# Altium PCB УШЯИ.411618.029Э.pcbdoc (part 2 of 6)
Units mil, origin at the board's own origin, x right, y up, seen from the top; angles counter-clockwise.
Board outline 13385.8 x 6692.9 mil, 4 copper layers (Top Layer, Supply, GND, Bottom Layer), stack 62.3 mil thick; 637 components, 474 nets, 1978 pads, 458 vias.
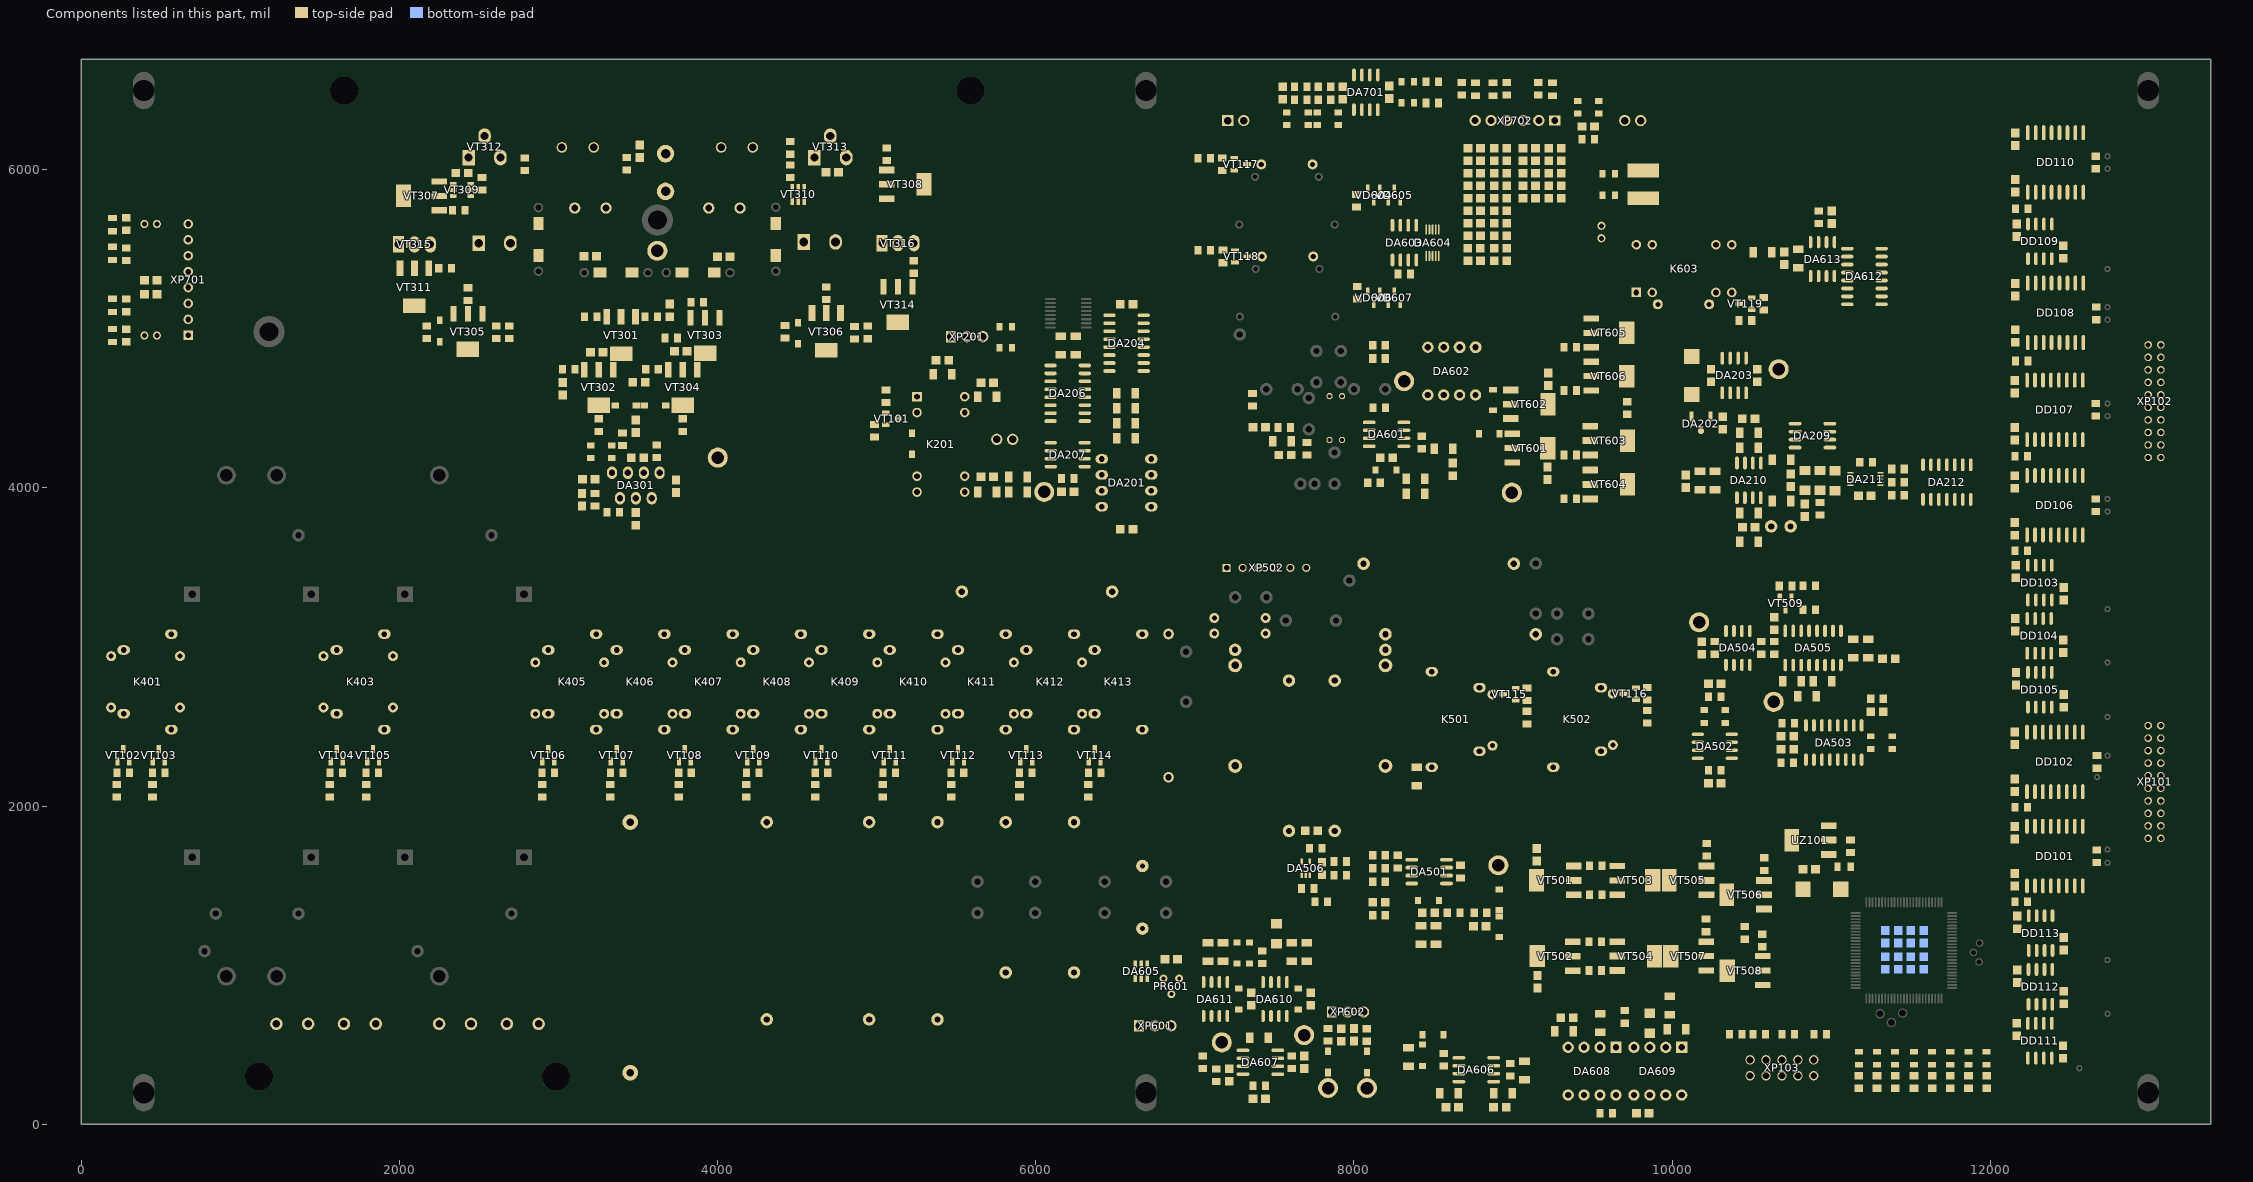
[diagram p4: the components of this part, seen from the top]

## Components (designator, comment, footprint, x,y, rotation, side; value= is the part's Value field where it differs from the comment) (continued)
R201 "Резистор 10кОм 0.25Вт 1% [1206]" R1206#1 6566.9,4310.8 r180 top locked
R202 "Резистор 4,99кОм 0.25Вт 1% [1206]" R1206#1 6566.9,4405.3 r0 top locked
R203 "Резистор 2,49кОм 0.25Вт 1% [1206]" R1206#1 6566.9,4499.8 r180 top locked
R204 "Резистор 2,49кОм 0.25Вт 1% [1206]" R1206#1 6566.9,4594.3 r0 top locked
R205 "Резистор 9,09кОм 0.25Вт 1% [1206]" R1206#1 6157.5,4893.5 r90 top locked
R206 "Резистор 1кОм 0.25Вт 1% [1206]" R1206#1 6251.9,4893.5 r270 top locked
R207 "Резистор 120Ом 0.125Вт 1% [0805]" R0805#1 6200.8,4058.8 r180 top locked
R208 "Резистор 3,83кОм 0.25Вт 1% [1206]" R1206#2 5887.8,3974 r180 top locked
R209 "Резистор 4,99кОм 0.25Вт 1% [1206]" R1206#2 5694.9,3974 r180 top locked
R210 "Резистор 40,2кОм 0.25Вт 1% [1206]" R1206#1 5413.4,4713.8 r0 top locked
R211 "Резистор 3,83кОм 0.25Вт 1% [1206]" R1206#2 5887.8,4068.5 r180 top locked
R213 "Резистор 2кОм 0.25Вт 1% [1206]" R1206#2 5694.9,4572.4 r180 top locked
R217 "Резистор 24,9кОм 0.25Вт 1% [1206]" R1206#1 10482.2,4345.9 r180 top locked
R218 "Резистор 11,8кОм 0.25Вт 1% [1206]" R1206#1 10482.2,4251.4 r180 top locked
R219 "Резистор 24,9кОм 0.25Вт 1% [1206]" R1206#2 10175.1,4046.7 r270 top locked
R220 "Резистор 30,1кОм 0.25Вт 1% [1206]" R1206#2 10269.6,4046.7 r270 top locked
R221 "Резистор 20кОм 0.25Вт 1% [1206]" R1206#1 10482.2,3660.8 r0 top locked
R222 "Резистор 14кОм 0.25Вт 1% [1206]" R1206#1 10482.2,3841.9 r0 top locked
R223 "Резистор 33Ом 0,125Вт 1% [0805]" R1206#1 10686.9,3916.7 r180 top locked
R224 "Резистор 33Ом 0,125Вт 1% [0805]" R1206#1 10686.9,4176.6 r180 top locked
R225 "Резистор 33Ом 0,125Вт 1% [0805]" R0805#1 11419.3,4118.4 r180 top locked
R226 "Резистор 33Ом 0,125Вт 1% [0805]" R0805#1 11419.3,4035.7 r180 top locked
R227 "Резистор 33Ом 0,125Вт 1% [0805]" R0805#1 11419.3,3953 r180 top locked
R228 "Резистор 22Ом 0,125Вт 1% [0805]" R0805#3 10929.1,3867.6 r90 top locked
R229 "Резистор 15Ом 0,125Вт 1% [0805]" R0805#3 11218.5,4161.7 r180 top locked
R301 "Резистор 4.6кОм 0,125Вт 1% [0805]" R0805#2 3345.1,3846.5 r0 top locked
R302 "Резистор 1.2кОм 0,125Вт 1% [0805]" R0805#1 3229.7,3924.5 r270 top locked
R303 "Резистор 1.8кОм 0,125Вт 1% [0805]" R0805#1 3402.9,4306 r270 top locked
R304 "Резистор 1.2кОм 0,125Вт 1% [0805]" R0805#1 3618.3,4230.4 r270 top locked
R305 "Резистор 220Ом 0,125Вт 1% [0805]" R0805#2 3202.2,5075.6 r0 top locked
R306 "Резистор 220Ом 0,125Вт 1% [0805]" R0805#2 3064.4,4744.9 r0 top locked
R307 "Резистор 22кОм 0,125Вт 1% [0805]" R0805#1 3584,5075.6 r0 top locked
R308 "Резистор 22кОм 0,125Вт 1% [0805]" R0805#2 3710,4941.8 r180 top locked
R309 "Резистор 220Ом 0,125Вт 1% [0805]" R0805#2 3871.4,5166.2 r180 top locked
R310 "Резистор 220Ом 0,125Вт 1% [0805]" R0805#3 3588,4744.9 r0 top locked
R311 "Резистор 3кОм 0,125Вт 1% [0805]" R0805#1 2691.1,4977.8 r90 top locked
R312 "Резистор 2.4кОм 0,125Вт 1% [0805]" R0805#1 2608.4,4977.8 r90 top locked
R313 "Резистор 7.2кОм 0,125Вт 1% [0805]" R0805#1 2171.4,4977.8 r90 top locked
R314 "Резистор 18кОм 0,125Вт 1% [0805]" R0805#3 2431.2,5218 r90 top locked
R315 "Резистор 120Ом 0,125Вт 1% [0805]" R0805#2 3253.3,4394.5 r270 top locked
R316 "Резистор 120Ом 0,125Вт 1% [0805]" R0805#2 3780.9,4394.5 r270 top locked
R317 "Резистор 7.2кОм 0,125Вт 1% [0805]" R0805#1 4423.9,4980.4 r90 top locked
R318 "Резистор 2.4кОм 0,125Вт 1% [0805]" R0805#3 4861.1,4975.1 r90 top locked
R319 "Резистор 3кОм 0,125Вт 1% [0805]" R0805#3 4943.6,4976.5 r90 top locked
R320 "Резистор 18кОм 0,125Вт 1% [0805]" R0805#3 4684,5223.1 r90 top locked
R321 "Резистор 240Ом 0.25Вт 1% [1206]" R0805#3 2519.7,5911.7 r90 top locked
R322 "Резистор 1кОм 0,125Вт 5% [0805]" R0805#2 2787.4,6033.7 r270 top locked
R323 "Резистор 300Ом 0,125Вт 1% [0805]" R0805#1 2374,5744.4 r0 top locked
R324 "Резистор MP930-0.04-1% [TO-220-2]" TO-220-2_L10.4-W3.2-P5.08-L#1 3122,6139.3 r180 top locked
R325 "Резистор 100Ом 0,125Вт 1% [0805]" R0805#3 3429.1,6036.9 r270 top locked
R326 "Резистор MP930-0.04-1% [TO-220-2]" TO-220-2_L10.4-W3.2-P5.08-L#1 4122,6139.3 r180 top locked
R327 "Резистор 300Ом 0,125Вт 1% [0805]" R0805#1 5063,6096.7 r90 top locked
R328 "Резистор 1кОм 0,125Вт 5% [0805]" R0805#3 4456.7,6136.1 r90 top locked
R329 "Резистор 240Ом 0.25Вт 1% [1206]" R0805#1 4456.7,5990.4 r90 top locked
R330 "Резистор 1.5кОм 0,125Вт 1% [0805]" R0805#3 2287.4,5380.2 r0 top locked
R331 "Резистор 1.5кОм 0,125Вт 1% [0805]" R0805#2 5232.3,5388.1 r90 top locked
R401 "Резистор C2-29В-0,25  24кОм ±0,5% [DIP]" ?#3 6007.9,3347.6 r180 top locked
R402 "Резистор SM204031006FE 100МОм ±1%[DIP]" RES-TH_L27.4-W2.5-P22.86-D0.8 6834.6,2631.1 r270 top locked
R403 "Резистор RK1/4DCT52R1105F 11 МОм ±1% [DIP]" RK1/4DCT52R1105F 6669.7,1426.4 r270 top locked
R404 "Резистор C2-29В-0,25 1 МОм ±0,5% [DIP]" ?#3 6240.5,1426.4 r270 top locked
R405 "Резистор C2-29В-0,25 100 кОм ±0,5% [DIP]" ?#3 5811.4,1426.4 r270 top locked
R406 "Резистор C2-29B-1 10 кОм ±0,5% [DIP]" ?#4 5382.3,1278.7 r270 top locked
R407 "Резистор C2-29B-1 1 кОм ±0,5% [DIP]" ?#4 4953.1,1278.7 r270 top locked
R408 "Резистор C2-29B-1 100 Ом ±0,5% [DIP]" ?#4 4309.4,1278.7 r270 top locked
R409 "Резистор C2-29B-2 10 Ом ±0,5% [DIP]" ?#5 3451.2,1111.4 r270 top locked
R410 "Резистор MP930-2.00-1% [TO-220-2]" TO-220-2_L10.4-W3.2-P5.08-L#2 2775.6,631.1 r0 top locked
R411 "Резистор MP930-2.00-1% [TO-220-2]" TO-220-2_L10.4-W3.2-P5.08-L#2 2350.4,631.1 r0 top locked
R412 "Резистор MP930-0.20-1% [TO-220-2]" TO-220-2_L10.4-W3.2-P5.08-L#2 1752,631.1 r0 top locked
R413 "Резистор MP930-0.20-1% [TO-220-2]" TO-220-2_L10.4-W3.2-P5.08-L#2 1326.8,631.1 r0 top locked
R501 "Резистор C2-29В-0,25 1,2кОм ±0,5% [DIP]" ?#6 7725.5,2981.4 r0 top locked
R502 "Резистор C2-29В-0,25 301кОм ±0,5% [DIP]" ?#6 8670.4,3079.8 r0 top locked
R503 "Резистор C2-29В-0,25 5.1кОм ±0,5% [DIP]" ?#6 8532.7,3522.8 r0 top locked
R504 "Резистор 91кОм 0,125Вт 1% [0805]" R0805#2 8157.5,1312.5 r0 top locked
R505 "Резистор 2.4кОм 0,25Вт 1% [1206]" R1206#1 8394.8,2186.1 r90 top locked
R506 "Резистор C2-29В-0,25 51Ом ±0,5% [DIP]" ?#3 7591.6,2316 r90 top
R507 "Резистор C2-29В-0,25 22Ом ±0,5% [DIP]" ?#6 7879,2316 r270 top locked
R508 "Резистор 33Ом 0,125Вт 1% [0805]" R0805#3 8669.3,1588.1 r90 top locked
R509 "Резистор 150Ом 0,25Вт 1% [1206]" R1206#3 8515.7,1190.4 r270 top locked
R510 "Резистор 150Ом 0,25Вт 1% [1206]" R1206#2 8421.2,1190.4 r90 top locked
R511 "Резистор 5,1кОм 0,125Вт 1% [0805]" R0805#1 8626,1328.2 r180 top locked
R512 "Резистор 4,7кОм 0,125Вт 1% [0805]" R0805#2 8795.3,1328.2 r0 top locked
R513 "Резистор 820Ом 0,125Вт 1% [0805]" R0805#3 10216.5,1725.9 r90 top locked
R514 "Резистор 2кОм 0,125Вт 1% [0805]" R0805#1 10578.7,1635.3 r90 top locked
R515 "Резистор 200кОм 0,125Вт 1% [0805]" R0805#2 10456.7,1202.3 r90 top locked
R516 "Резистор 820Ом 0,125Вт 1% [0805]" R0805#3 10212.6,1249.5 r270 top locked
R517 "Резистор 2кОм 0,125Вт 1% [0805]" R0805#3 10566.9,1155 r270 top locked
R518 "Резистор 40,2кОм 0.25Вт 1% [1206]" R0805#3 10267.7,2686.5 r0 top locked
R519 "Резистор 15кОм 0,125Вт 1% [0805]" R0805#3 10267.7,2225.9 r180 top locked
R520 "Резистор 200кОм 0,125Вт 1% [0805]" R0805#3 11287.4,2674.7 r0 top locked
R521 "Резистор 10кОм 0,125Вт 1% [0805]" R0805#3 10724.4,2273.1 r180 top locked
R522 "Резистор 100кОм 0,125Вт 1% [0805]" R0805#2 10728.3,2521.2 r180 top locked
R523 "Резистор 4,02кОм 0.25Вт 1% [1206]" R1206#3 10751.9,2784.9 r180 top locked
R524 "Резистор 4,02кОм 0.25Вт 1% [1206]" R1206#3 10846.4,2690.4 r180 top locked
R525 "Резистор 4,02кОм 0.25Вт 1% [1206]" R1206#2 10944.9,2784.9 r180 top locked
R526 "Резистор 4,02кОм 0.25Вт 1% [1206]" R1206#2 11137.8,2989.7 r270 top locked
R527 "Резистор 4,02кОм 0.25Вт 1% [1206]" R1206#3 11232.3,2989.7 r90 top locked
R528 "Резистор 3,6кОм 0,125Вт 1% [0805]" R0805#3 10267.7,2993.6 r270 top locked
R529 "Резистор 110кОм 0,125Вт 1% [0805]" R0805#3 10559,2993.6 r270 top locked
R530 "Резистор 110кОм 0,125Вт 1% [0805]" R0805#3 10641.7,2993.6 r90 top locked
R531 "Резистор 5,3кОм 0,125Вт 1% [0805]" R0805#3 10862.2,3233.8 r180 top locked
R532 "Резистор 100Ом 0,125Вт 1% [0805]" R0805#3 10862.2,3383.4 r180 top locked
R533 "Резистор 100Ом 0,125Вт 1% [0805]" R0805#2 10712.6,3383.3 r0 top locked
R534 "Резистор 400Ом 0,125Вт 1% [0805]" R0805#1 9519.7,1623.5 r180 top locked
R535 "Резистор 150Ом 0,125Вт 1% [0805]" R0805#1 9519.7,1442.4 r180 top locked
R536 "Резистор 150Ом 0,125Вт 1% [0805]" R0805#2 9515.7,966.1 r180 top locked
R537 "Резистор 400Ом 0,125Вт 1% [0805]" R0805#2 9515.7,1147.2 r180 top locked
R538 "Резистор 150Ом 0,125Вт 1% [0805]" R0805#1 7913.4,1651.1 r180 top locked
R539 "Резистор 150Ом 0,125Вт 1% [0805]" R0805#1 7913.4,1564.5 r180 top locked
R601 "Резистор 51кОм 0,125Вт 1% [0805]" R0805#2 7362.2,4552.6 r270 top locked
R602 "Резистор 12кОм 0,125Вт 1% [0805]" R0805#1 7704.7,4245.6 r270 top locked
R603 "Резистор 5,1кОм 0,125Вт 1% [0805]" R0805#2 7563,4379.4 r0 top locked
R604 "Резистор 301кОм 0.25Вт 1% [1206]" R1206#1 7547.2,4292.8 r0 top locked
R605 "Резистор C2-29В-0,125 5,1кОм 0,125Вт 1% [DIP]" R0.125W 7846.4,4438.5 r90 top locked
R606 "Резистор C2-29В-0,125 301кОм 0,125Вт 1% [DIP]" R0.125W 7925.2,4438.5 r90 top locked
R607 "Резистор 51кОм 0,125Вт 1% [0805]" R0805#2 8157.5,4895.2 r0 top locked
R608 "Резистор 12кОм 0,125Вт 1% [0805]" R0805#2 8157.5,4812.5 r0 top locked
R609 "Резистор 33Ом 0,125Вт 1% [0805]" R0805#2 8425.2,4284.9 r270 top locked
R610 "Резистор 33Ом 0,125Вт 1% [0805]" R0805#1 8159.8,4504.3 r0 top
R611 "Резистор 150Ом 0,25Вт 1% [1206]" R1206#1 8385.8,3962.1 r0 top locked
R612 "Резистор 150Ом 0,25Вт 1% [1206]" R1206#1 8385.8,4056.6 r180 top locked
R613 "Резистор 5,1кОм 0,125Вт 1% [0805]" R0805#2 8126,4033 r0 top locked
R614 "Резистор 4,7кОм 0,25Вт 1% [1206]" R1206#1 8563,4245.6 r180 top locked
R615 "Резистор 820Ом 0,125Вт 1% [0805]" R0805#2 9358.2,4206.2 r180 top locked
R616 "Резистор 2кОм 0,125Вт 1% [0805]" R0805#2 9358.2,3930.6 r180 top locked
R617 "Резистор 200кОм 0,125Вт 1% [0805]" R0805#1 9716.5,4501.5 r270 top locked
R618 "Резистор 820Ом 0,125Вт 1% [0805]" R0805#1 9358.2,4883.4 r0 top locked
R619 "Резистор 2кОм 0,125Вт 1% [0805]" R0805#1 9358.2,4611.7 r0 top locked
R620 "Резистор 300Ом 0,125Вт 1% [0805]" R0805#3 8016,5803.6 r270 top locked
R621 "Резистор 300Ом 0,125Вт 1% [0805]" R0805#1 8019.7,5225.9 r270 top locked
R622 "Резистор 300Ом 0,125Вт 1% [0805]" R0805#3 8316.9,5344 r0 top locked
R623 "Резистор 10кОм 0.25Вт 1% [1206]" R1206#3 8342.5,422.4 r270 top locked
R624 "Резистор 10кОм 0.25Вт 1% [1206]" R1206#1 8598.4,194.1 r0 top locked
R625 "Резистор 10кОм 0.25Вт 1% [1206]" R1206#1 9071.9,338.7 r270 top locked
R626 "Резистор 10кОм 0.25Вт 1% [1206]" R1206#1 8937,194.1 r180 top locked
R627 "Резистор 10кОм 0,125Вт 1% [0805]" R0805#3 8981.4,342.6 r90 top locked
R628 "Резистор 10кОм 0,125Вт 1% [0805]" R0805#3 8564.1,405.6 r90 top locked
R629 "Резистор 470Ом 0,125Вт 1% [0805]" R0805#1 7050.4,389.4 r270 top
R630 "Резистор 12кОм 0,125Вт 1% [0805]" R0805#1 7133.5,308.3 r270 top
R631 "Резистор 10кОм 0.25Вт 1% [1206]" R1206#1 9318.9,583.9 r0 top locked
R632 "Резистор 17,2кОм 0.25Вт 1% [1206]" R1206#1 9547.5,636.6 r270 top locked
R633 "Резистор 17,2кОм 0.25Вт 1% [1206]" R1206#3 9984.5,746.8 r270 top locked
R634 "Резистор 10кОм 0.25Вт 1% [1206]" R1206#2 10027.8,597.2 r180 top locked
R635 "Резистор 12кОм 0,125Вт 1% [0805]" R0805#1 7403.9,241.7 r180 top
R636 "Резистор 10кОм 0.25Вт 1% [0805]" R0805#3 7608.6,389.6 r270 top
R637 "Резистор 5,1кОм 0,125Вт 1% [0805]" R0805#3 9701,674.4 r90 top locked
R638 "Резистор 10кОм 0.25Вт 1% [1206]" R1206#3 7403.9,543.1 r0 top
R639 "Резистор 4,99кОм 0.25Вт 1% [1206]" R1206#1 7704.3,1082 r270 top
R640 "Резистор 10кОм 0.25Вт 1% [1206]" R1206#1 7609.8,1082 r270 top
R641 "Резистор 4,99кОм 0.25Вт 1% [1206]" R1206#1 7177.1,1082 r270 top
R642 "Резистор 10кОм 0.25Вт 1% [1206]" R1206#1 7082.6,1082 r270 top
R643 "Резистор 24кОм 0,125Вт 1% [0805]" R0805#2 7424,1049.6 r90 top
R644 "Резистор 4,7кОм 0,125Вт 1% [0805]" R0805#2 8081.4,560.7 r270 top
R645 "Резистор 4,7кОм 0,125Вт 1% [0805]" R0805#3 7837.1,561.4 r270 top
R646 "Резистор 12кОм 0,125Вт 1% [0805]" R0805#1 9586.8,68.1 r0 top locked
R649 "Резистор 2кОм 0.25Вт 1% [1206]" R1206#1 10566.9,5480.4 r180 top locked
R650 "Резистор 2кОм 0.25Вт 1% [1206]" R1206#1 10791.5,5442.3 r90 top locked
R653 "Резистор 3,3кОм 0,125Вт 1% [0805]" R0805#1 10921.2,5700.9 r270 top locked
R701 "Резистор 3кОм 0,125Вт 1% [0805]" R0805#2 283.3,4957.3 r270 top locked
R702 "Резистор 510Ом 0,125Вт 1% [0805]" R0805#3 283.3,5146.3 r90 top locked
R703 "Резистор 510Ом 0,125Вт 1% [0805]" R0805#2 283.3,5469.1 r270 top locked
R704 "Резистор 3кОм 0,125Вт 1% [0805]" R0805#3 283.3,5658.1 r270 top locked
R705 "Резистор 150Ом 0,125Вт 1% [0805]" R0805#1 9157.5,6509.3 r90 top locked
R706 "Резистор 1кОм 0,125Вт 1% [0805]" R0805#1 8960.6,6509.3 r90 top locked
R707 "Резистор 1кОм 0,125Вт 1% [0805]" R0805#1 8677.2,6509.3 r90 top locked
R708 "Резистор 240Ом 0,125Вт 1% [0805]" R0805#2 9472.4,6190.4 r180 top locked
R709 "Резистор 1,1кОм 0,125Вт 1% [0805]" R0805#3 8492.1,6552.6 r180 top locked
R710 "Резистор 1,1кОм 0,125Вт 1% [0805]" R0805#3 8492.1,6418.8 r0 top locked
R711 "Резистор 1,1кОм 0,125Вт 1% [0805]" R0805#1 7814.9,6438.5 r0 top locked
R712 "Резистор 22 кОм 0,125Вт 1% [0805]" R0805#1 7814.9,6521.1 r0 top locked
R713 "Резистор 330Ом 0,125Вт 1% [0805]" R0805#1 7665.3,6438.5 r0 top locked
R714 "Резистор 22 кОм 0,125Вт 1% [0805]" R0805#1 7665.3,6521.1 r0 top locked
UZ101 "Линейный регулятор напряжения LM1117GS-3.3 [SOT-223]" SOT-223-3_L6.5-W3.4-P2.30-LS7.0-BR#1 10867.5,1785.8 r0 top locked
VD101 "Светодиод YLED0805YG [0805]" LED0805-R-RD#1 11080.9,1617.9 r0 top locked
VD102 "Светодиод FYLS-0805GC [0805]" FYLS-0805GC 11976.3,414.9 r270 top locked (schematic designator VD109)
VD103 "Светодиод FYLS-0805GC [0805]" FYLS-0805GC 11862.1,414.9 r270 top locked (schematic designator VD108)
VD104 "Светодиод FYLS-0805GC [0805]" FYLS-0805GC 11748,414.9 r270 top locked (schematic designator VD107)
VD105 "Светодиод FYLS-0805GC [0805]" FYLS-0805GC 11633.8,414.9 r270 top locked (schematic designator VD106)
VD106 "Светодиод FYLS-0805GC [0805]" FYLS-0805GC 11519.6,414.9 r270 top locked (schematic designator VD105)
VD107 "Светодиод FYLS-0805GC [0805]" FYLS-0805GC 11401.5,414.9 r270 top locked (schematic designator VD104)
VD108 "Светодиод FYLS-0805GC [0805]" FYLS-0805GC 11287.3,414.9 r270 top locked (schematic designator VD103)
VD109 "Светодиод FYLS-0805GC [0805]" FYLS-0805GC 11173.2,414.9 r270 top locked (schematic designator VD102)
VD110 "Диод импульсный 1N4448 [SOD-123]" SOD-123_L2.7-W1.6-LS3.7-RD-1#1 5222.4,4277.1 r90 top locked
VD111 "Диод импульсный 1N4448 [DO-35]" DO-35_BD2.0-L4.2-P8.20-D0.5-RD#1 189,2780.7 r270 top locked
VD112 "Диод импульсный 1N4448 [DO-35]" DO-35_BD2.0-L4.2-P8.20-D0.5-RD#1 622,2780.7 r90 top locked
VD113 "Диод импульсный 1N4448 [DO-35]" DO-35_BD2.0-L4.2-P8.20-D0.5-RD#1 1523.6,2780.7 r270 top locked
VD114 "Диод импульсный 1N4448 [DO-35]" DO-35_BD2.0-L4.2-P8.20-D0.5-RD#1 1960.6,2780.7 r90 top locked
VD115 "Диод импульсный 1N4448 [DO-35]" DO-35_BD2.0-L4.2-P8.20-D0.5-RD#2 2854.3,2741.3 r270 top locked
VD116 "Диод импульсный 1N4448 [DO-35]" DO-35_BD2.0-L4.2-P8.20-D0.5-RD#2 3287.4,2741.3 r270 top locked
VD117 "Диод импульсный 1N4448 [DO-35]" DO-35_BD2.0-L4.2-P8.20-D0.5-RD#2 3716.5,2741.3 r270 top locked
VD118 "Диод импульсный 1N4448 [DO-35]" DO-35_BD2.0-L4.2-P8.20-D0.5-RD#2 4145.7,2741.3 r270 top locked
VD119 "Диод импульсный 1N4448 [DO-35]" DO-35_BD2.0-L4.2-P8.20-D0.5-RD#2 4574.8,2741.3 r270 top locked
VD120 "Диод импульсный 1N4448 [DO-35]" DO-35_BD2.0-L4.2-P8.20-D0.5-RD#2 5003.9,2741.3 r270 top locked
VD121 "Диод импульсный 1N4448 [DO-35]" DO-35_BD2.0-L4.2-P8.20-D0.5-RD#2 5433.1,2741.3 r270 top locked
VD122 "Диод импульсный 1N4448 [DO-35]" DO-35_BD2.0-L4.2-P8.20-D0.5-RD#2 5862.2,2741.3 r270 top locked
VD123 "Диод импульсный 1N4448 [DO-35]" DO-35_BD2.0-L4.2-P8.20-D0.5-RD#2 6291.3,2741.3 r270 top locked
VD124 "Диод импульсный 1N4448 [DO-35]" DO-35_BD2.0-L4.2-P8.20-D0.5-RD#3 8871.1,2540.4 r90 top locked
VD125 "Диод импульсный 1N4448 [DO-35]" DO-35_BD2.0-L4.2-P8.20-D0.5-RD#4 9627,2544.4 r90 top locked
VD126 "Диод импульсный 1N4448 [DO-35]" DO-35_BD2.0-L4.2-P8.20-D0.5-RD#1 7578.7,6033 r180 top locked
VD127 "Диод импульсный 1N4448 [DO-35]" DO-35_BD2.0-L4.2-P8.20-D0.5-RD#3 7582.7,5454.2 r180 top locked
VD128 "Диод импульсный 1N4448 [DO-35]" DO-35_BD2.0-L4.2-P8.20-D0.5-RD#3 10070.8,5153.6 r0 top locked
VD201 "Диод импульсный 1N4448 [SOD-123]" SOD-123_L2.7-W1.6-LS3.7-RD-1#1 5850.4,4946.1 r270 top locked
VD202 "Диод импульсный 1N4448 [SOD-123]" SOD-123_L2.7-W1.6-LS3.7-RD-1#2 5771.6,4946.1 r90 top locked
VD301 "Диод импульсный 1N4448 [SOD-123]" SOD-123_L2.7-W1.6-LS3.7-RD-1#3 3269.1,4266.6 r0 top locked
VD302 "Диод импульсный 1N4448 [SOD-123]" SOD-123_L2.7-W1.6-LS3.7-RD-1#3 3269.1,4187.9 r180 top locked
VD303 "Диод импульсный 1N4448 [SOD-123]" SOD-123_L2.7-W1.6-LS3.7-RD-1#2 3422.6,4518.2 r180 top locked
VD304 "Диод импульсный 1N4448 [SOD-123]" SOD-123_L2.7-W1.6-LS3.7-RD-1#1 3607.7,4518.2 r180 top locked
VD305 "Диод импульсный 1N4448 [SOD-123]" SOD-123_L2.7-W1.6-LS3.7-RD-1#1 2254.1,4985.7 r90 top locked
VD306 "Диод импульсный 1N4448 [SOD-123]" SOD-123_L2.7-W1.6-LS3.7-RD-1#1 4506.8,4971.2 r270 top locked
VD307 "Диод RS1M [SMA] (допускается замена на FR307 [DO-201AD])" SMA/DO-214AC 2874,5561.3 r90 top locked
VD308 "Диод КД2970А [TO-220AC]" TO-220AC-2_L10.0-W4.5-P5.08-T#1 2598.4,5537.7 r90 top locked
VD309 "Диод RS1M [SMA] (допускается замена на FR307 [DO-201AD])" SMA/DO-214AC 3362.2,5352.6 r0 top locked
VD310 "Диод защитный 1.5KE56CA [DO-201AD/DO-27]" DO-201 3673.2,6099.9 r270 top locked
VD311 "Диод RS1M [SMA] (допускается замена на FR307 [DO-201AD])" SMA/DO-214AC 3878,5352.6 r0 top locked
VD312 "Диод КД2970А [TO-220AC]" TO-220AC-2_L10.0-W4.5-P5.08-T#2 4641.7,5545.5 r90 top locked
VD313 "Диод RS1M [SMA] (допускается замена на FR307 [DO-201AD])" SMA/DO-214AC 4366.2,5561.3 r270 top locked
VD501 "Диод импульсный 1N4448 [DO-35]" DO-35_BD2.0-L4.2-P8.20-D0.5-RD#5 7283.5,3083.9 r0 top locked
VD502 "Диод импульсный 1N4448 [DO-35]" DO-35_BD2.0-L4.2-P8.20-D0.5-RD#3 7283.5,3182.3 r180 top locked
VD503 "Стабилитрон MMSZ5230B 4.7В 0.5Вт [SOD123]" SOD-123_L2.8-W1.8-LS3.7-RD#1 8468.5,1407 r180 top locked
VD504 "Стабилитрон MMSZ5232B 5.6В 0.5Вт [SOD123]" SOD-123_L2.7-W1.6-LS3.7-RD#1 8913.4,1410.9 r270 top locked
VD505 "Стабилитрон MMSZ5232B 5.6В 0.5Вт [SOD123]" SOD-123_L2.7-W1.6-LS3.7-RD#2 8913.4,1241.6 r270 top locked
VD506 "Диод импульсный 1N4448 [SOD-123]" SOD-123_L2.7-W1.6-LS3.7-RD-1#3 10267.7,2603.8 r0 top locked
VD507 "Диод импульсный 1N4448 [SOD-123]" SOD-123_L2.7-W1.6-LS3.7-RD-1#3 10267.7,2521.2 r180 top locked
VD508 "Диод импульсный 1N4448 [SOD-123]" SOD-123_L2.7-W1.6-LS3.7-RD-1#1 11314.9,2438.5 r0 top locked
VD509 "Диод импульсный 1N4448 [SOD-123]" SOD-123_L2.7-W1.6-LS3.7-RD-1#2 11314.9,2359.7 r180 top locked
VD601 "Стабилитрон MMSZ5230B 4.7В 0.5Вт [SOD123]" SOD-123_L2.8-W1.8-LS3.7-RD#2 8200.8,4111.7 r0 top locked
VD602 "Стабилитрон MMSZ5232B 5.6В 0.5Вт [SOD123]" SOD-123_L2.7-W1.6-LS3.7-RD#3 8850.4,4340 r180 top locked
VD603 "Стабилитрон MMSZ5232B 5.6В 0.5Вт [SOD123]" SOD-123_L2.7-W1.6-LS3.7-RD#4 8874,4552.6 r90 top locked
VD604 "Диод JPAD50 [SOT-23]" SOT-23-3_L3.0-W1.6-P1.90-LS2.8-L#1 8124,5840 r90 top locked
VD605 "Диод JPAD50 [SOT-23]" SOT-23-3_L3.0-W1.6-P1.90-LS2.8-L#2 8253.9,5840 r270 top locked
VD606 "Диод JPAD50 [SOT-23]" SOT-23-3_L3.0-W1.6-P1.90-LS2.8-L#3 8124,5194.4 r90 top locked
VD607 "Диод JPAD50 [SOT-23]" SOT-23-3_L3.0-W1.6-P1.90-LS2.8-L#3 8253.9,5194.4 r270 top locked
VD608 "Стабилитрон MMSZ5223B 2.7В 0.5Вт [SOD123]" SOD-123_L2.8-W1.8-LS3.7-RD#3 8430.2,433.2 r270 top locked
VD609 "Стабилитрон MMSZ5223B 2.7В 0.5Вт [SOD123]" SOD-123_L2.8-W1.8-LS3.7-RD#3 8497.1,563.1 r0 top locked
VD610 "Стабилитрон MMSZ5234B 6.2В 0.5Вт [SOD123]" SOD-123_L2.8-W1.8-LS3.7-RD#1 7343.3,1076.7 r270 top
VD611 "Стабилитрон MMSZ5234B 6.2В 0.5Вт [SOD123]" SOD-123_L2.8-W1.8-LS3.7-RD#1 7264.6,1076.7 r270 top
VD612 "Стабилитрон MMSZ5234B 6.2В 0.5Вт [SOD123]" SOD-123_L2.8-W1.8-LS3.7-RD#3 7275.2,787.4 r270 top
VD613 "Стабилитрон MMSZ5234B 6.2В 0.5Вт [SOD123]" SOD-123_L2.8-W1.8-LS3.7-RD#1 7649.2,786.8 r90 top
VD614 "Диод импульсный 1N4448 [SOD-123]" SOD-123_L2.7-W1.6-LS3.7-RD-1#2 7837.1,392.1 r270 top
VD615 "Диод импульсный 1N4448 [SOD-123]" SOD-123_L2.7-W1.6-LS3.7-RD-1#1 8081.4,391.4 r90 top
VD701 "Светодиод YLED0805YG [0805]" LED0805-R-RD#2 196.7,4957.3 r270 top locked
VD702 "Светодиод YLED0805YG [0805]" LED0805-R-RD#1 196.7,5146.3 r90 top locked
VD703 "Светодиод YLED0805YG [0805]" LED0805-R-RD#1 196.7,5473.1 r270 top locked
VD704 "Светодиод YLED0805YG [0805]" LED0805-R-RD#1 196.7,5654.2 r270 top locked
VD705 "Светодиод YLED0805YG [0805]" LED0805-R-RD#2 9248,6505.4 r90 top locked
VD706 "Светодиод YLED0805YG [0805]" LED0805-R-RD#2 8874,6505.4 r90 top locked
VD707 "Светодиод YLED0805YG [0805]" LED0805-R-RD#2 8763.8,6505.4 r90 top locked
VD708 "Диод импульсный 1N4448 [SOD-123]" SOD-123_L2.7-W1.6-LS3.7-RD-1#2 9472.4,6430.6 r180 top locked
VD709 "Диод импульсный 1N4448 [SOD-123]" SOD-123_L2.7-W1.6-LS3.7-RD-1#1 9472.4,6351.9 r0 top locked
VD710 "Диод импульсный 1N4448 [SOD-123]" SOD-123_L2.7-W1.6-LS3.7-RD-1#1 9563,5907 r270 top locked
VD711 "Диод импульсный 1N4448 [SOD-123]" SOD-123_L2.7-W1.6-LS3.7-RD-1#2 9641.7,5907 r90 top locked
VD712 "Диод импульсный 1N4448 [SOD-123]" SOD-123_L2.7-W1.6-LS3.7-RD-1#3 8377.9,6485.7 r270 top locked
VD713 "Диод импульсный 1N4448 [SOD-123]" SOD-123_L2.7-W1.6-LS3.7-RD-1#3 8299.2,6485.7 r90 top locked
VD714 "Диод импульсный 1N4448 [SOD-123]" SOD-123_L2.7-W1.6-LS3.7-RD-1#2 7834.6,6359.7 r180 top locked
VD715 "Диод импульсный 1N4448 [SOD-123]" SOD-123_L2.7-W1.6-LS3.7-RD-1#1 7834.6,6281 r0 top locked
VD716 "Диод импульсный 1N4448 [SOD-123]" SOD-123_L2.7-W1.6-LS3.7-RD-1#1 7645.7,6281 r180 top locked
VD717 "Диод импульсный 1N4448 [SOD-123]" SOD-123_L2.7-W1.6-LS3.7-RD-1#2 7645.7,6359.7 r0 top locked
VT101 "Транзистор полевой MOSFET N-канальный BSS138BK [SOT-23-3]" SOT-23-3_L2.9-W1.3-P1.90-LS2.4-BR#1 5096.4,4434.6 r180 top locked
VT102 "Транзистор полевой MOSFET N-канальный BSS138BK [SOT-23-3]" SOT-23-3_L2.9-W1.3-P1.90-LS2.4-BR#2 265.7,2318.8 r270 top locked
VT103 "Транзистор полевой MOSFET N-канальный BSS138BK [SOT-23-3]" SOT-23-3_L2.9-W1.3-P1.90-LS2.4-BR#2 488.2,2318.8 r270 top locked
VT104 "Транзистор полевой MOSFET N-канальный BSS138BK [SOT-23-3]" SOT-23-3_L2.9-W1.3-P1.90-LS2.4-BR#2 1606.3,2318.8 r270 top locked
VT105 "Транзистор полевой MOSFET N-канальный BSS138BK [SOT-23-3]" SOT-23-3_L2.9-W1.3-P1.90-LS2.4-BR#2 1834.6,2318.8 r270 top locked
VT106 "Транзистор полевой MOSFET N-канальный BSS138BK [SOT-23-3]" SOT-23-3_L2.9-W1.3-P1.90-LS2.4-BR#2 2936.6,2318.8 r270 top locked
VT107 "Транзистор полевой MOSFET N-канальный BSS138BK [SOT-23-3]" SOT-23-3_L2.9-W1.3-P1.90-LS2.4-BR#2 3365.7,2318.8 r270 top locked
VT108 "Транзистор полевой MOSFET N-канальный BSS138BK [SOT-23-3]" SOT-23-3_L2.9-W1.3-P1.90-LS2.4-BR#2 3794.9,2318.8 r270 top locked
VT109 "Транзистор полевой MOSFET N-канальный BSS138BK [SOT-23-3]" SOT-23-3_L2.9-W1.3-P1.90-LS2.4-BR#2 4224,2318.8 r270 top locked
VT110 "Транзистор полевой MOSFET N-канальный BSS138BK [SOT-23-3]" SOT-23-3_L2.9-W1.3-P1.90-LS2.4-BR#2 4653.1,2318.8 r270 top locked
VT111 "Транзистор полевой MOSFET N-канальный BSS138BK [SOT-23-3]" SOT-23-3_L2.9-W1.3-P1.90-LS2.4-BR#2 5082.3,2318.8 r270 top locked
VT112 "Транзистор полевой MOSFET N-канальный BSS138BK [SOT-23-3]" SOT-23-3_L2.9-W1.3-P1.90-LS2.4-BR#2 5511.4,2318.8 r270 top locked
VT113 "Транзистор полевой MOSFET N-канальный BSS138BK [SOT-23-3]" SOT-23-3_L2.9-W1.3-P1.90-LS2.4-BR#2 5940.5,2318.8 r270 top locked
VT114 "Транзистор полевой MOSFET N-канальный BSS138BK [SOT-23-3]" SOT-23-3_L2.9-W1.3-P1.90-LS2.4-BR#2 6369.7,2318.8 r270 top locked
VT115 "Транзистор полевой MOSFET N-канальный BSS138BK [SOT-23-3]" SOT-23-3_L2.9-W1.3-P1.90-LS2.4-BR#2 8977.4,2701.9 r0 top locked
VT116 "Транзистор полевой MOSFET N-канальный BSS138BK [SOT-23-3]" SOT-23-3_L2.9-W1.3-P1.90-LS2.4-BR#2 9733.3,2705.8 r0 top locked
VT117 "Транзистор полевой MOSFET N-канальный BSS138BK [SOT-23-3]" SOT-23-3_L2.9-W1.3-P1.90-LS2.4-BR#3 7287.4,6033 r180 top locked
VT118 "Транзистор полевой MOSFET N-канальный BSS138BK [SOT-23-3]" SOT-23-3_L2.9-W1.3-P1.90-LS2.4-BR#1 7291.3,5454.2 r180 top locked
VT119 "Транзистор полевой MOSFET N-канальный BSS138BK [SOT-23-3]" SOT-23-3_L2.9-W1.3-P1.90-LS2.4-BR#3 10460.6,5157.6 r0 top locked
VT301 "Транзистор DZTA92 PNP [SOT223]" SOT-223-3_L6.5-W3.4-P2.30-LS7.0-BR#2 3394.3,4958.7 r90 top locked
VT302 "Транзистор FZT758 PNP [SOT223]" SOT-223_L6.5-W3.5-P2.30-LS7.0-BR#1 3253.3,4630.8 r90 top locked
VT303 "Транзистор DZTA42 NPN [SOT223]" SOT-223-4_L6.5-W3.5-P2.30-LS7.0-BR#1 3921.4,4958.7 r90 top locked
VT304 "Транзистор FZT658 NPN [SOT223]" SOT-223_L6.5-W3.5-P2.30-LS7.0-BR#2 3780.9,4630.8 r90 top locked
VT305 "Транзистор DZTA42 NPN [SOT223]" SOT-223-4_L6.5-W3.5-P2.30-LS7.0-BR#1 2431.2,4981.8 r90 top locked
VT306 "Транзистор DZTA92 PNP [SOT223]" SOT-223-3_L6.5-W3.4-P2.30-LS7.0-BR#2 4683.2,4981.8 r90 top locked
VT307 "Транзистор DZTA42 NPN [SOT223]" SOT-223-4_L6.5-W3.5-P2.30-LS7.0-BR#2 2137.8,5834.9 r0 top locked
VT308 "Транзистор DZTA92 PNP [SOT223]" SOT-223-3_L6.5-W3.4-P2.30-LS7.0-BR#2 5181.1,5907.8 r180 top locked
VT309 "Транзистор ZXMN10A08E6 N-канал 100В 1.9А [SOT-23-6]" SOT-23-6_L2.9-W1.6-P0.95-LS2.7-BL 2393.7,5872.3 r270 top locked
VT310 "Транзистор ZXMP10A17E6 P-канал 100В 1.3А [SOT-23-6]" SOT-23-6_L2.9-W1.6-P0.95-LS2.8-BL#2 4507.9,5844.8 r0 top locked
VT311 "Транзистор DZTA92 PNP [SOT223]" SOT-223-3_L6.5-W3.4-P2.30-LS7.0-BR#3 2094.5,5262.1 r90 top locked
VT312 "Транзистор FQP13N10  N-канал 100В 12.8А [TO-220]" TO-220-3#1 2535.4,6120.3 r90 top locked
VT313 "Транзистор SFP9530 P-канал 100В 10.5А [TO-220]" TO-220-3#2 4708.7,6120.3 r90 top locked
VT314 "Транзистор DZTA42 NPN [SOT223]" SOT-223-4_L6.5-W3.5-P2.30-LS7.0-BR#3 5133.9,5151.8 r90 top locked
VT315 "Транзистор MJE5730G PNP [TO-220-3]" TO-220-3_L10.0-W4.5-P2.54-L 2094.5,5529.8 r0 top locked
VT316 "Транзистор TIP48 NPN [TO-220-3]" TO-220-3_L10.0-W4.5-P2.54-L 5133.9,5537.7 r0 top locked
VT501 "Транзистор DZT658 NPN [SOT223]" SOT-223-3_L6.5-W3.4-P2.30-LS7.0-BR#1 9263.7,1533 r0 top locked
VT502 "Транзистор FZT758 PNP [SOT223]" SOT-223_L6.5-W3.5-P2.30-LS7.0-BR#1 9263.8,1056.6 r0 top locked
VT503 "Транзистор DZTA42 NPN [SOT223]" SOT-223-4_L6.5-W3.5-P2.30-LS7.0-BR#4 9767.7,1533 r180 top locked
VT504 "Транзистор DZTA92 PNP [SOT223]" SOT-223-3_L6.5-W3.4-P2.30-LS7.0-BR#4 9771.6,1056.6 r180 top locked
VT505 "Транзистор DZTA92 PNP [SOT223]" SOT-223-3_L6.5-W3.4-P2.30-LS7.0-BR#3 10098.4,1533 r0 top locked
VT506 "Транзистор DZTA92 PNP [SOT223]" SOT-223-3_L6.5-W3.4-P2.30-LS7.0-BR#2 10460.6,1442.4 r0 top locked
VT507 "Транзистор DZTA42 NPN [SOT223]" SOT-223-4_L6.5-W3.5-P2.30-LS7.0-BR#5 10102.3,1056.6 r0 top locked
VT508 "Транзистор DZTA42 NPN [SOT223]" SOT-223-4_L6.5-W3.5-P2.30-LS7.0-BR#2 10456.7,966 r0 top locked
VT509 "Транзистор полевой MOSFET N-канальный BSS138BK [SOT-23-3]" SOT-23-3_L2.9-W1.3-P1.90-LS2.4-BR#2 10712.6,3273.1 r90 top locked
VT601 "Транзистор DZTA42 NPN [SOT223]" SOT-223-4_L6.5-W3.5-P2.30-LS7.0-BR#4 9106.3,4249.5 r180 top locked
VT602 "Транзистор DZTA92 PNP [SOT223]" SOT-223-3_L6.5-W3.4-P2.30-LS7.0-BR#4 9102.3,4525.1 r180 top locked
VT603 "Транзистор DZTA92 PNP [SOT223]" SOT-223-3_L6.5-W3.4-P2.30-LS7.0-BR#5 9602.3,4296.7 r180 top locked
VT604 "Транзистор DZTA92 PNP [SOT223]" SOT-223-3_L6.5-W3.4-P2.30-LS7.0-BR#4 9602.3,4021.2 r180 top locked
VT605 "Транзистор DZTA42 NPN [SOT223]" SOT-223-4_L6.5-W3.5-P2.30-LS7.0-BR#6 9602.3,4973.9 r180 top locked
VT606 "Транзистор DZTA42 NPN [SOT223]" SOT-223-4_L6.5-W3.5-P2.30-LS7.0-BR#7 9602.3,4702.3 r180 top locked
XP101 "Вилка на плату прямая BH2-20 (DS1014-20SF1B-B) 20pin шаг 2.00мм" CONN-TH_20P-P2.00_DS1014-20SF1B 13031.5,2151.1 r90 top locked
XP102 "Вилка на плату прямая BH2-20 (DS1014-20SF1B-B) 20pin шаг 2.00мм" CONN-TH_20P-P2.00_DS1014-20SF1B 13031.5,4544.8 r90 top locked
XP103 "Вилка на плату прямая BH-10 (DS1013-10S) 10pin шаг 2.54мм" IDC-TH_10P-P2.54-V-R2-C5-S2.54 10690,354.8 r0 top locked
XP201 "Вилка на плату 826629-3 шаг 2.54мм" HDR-TH_3P-P2.54-V-M-1 5566.9,4950 r0 top locked
XP202 "Вилка на плату 280370-2 шаг 2.54мм" CONN-TH_280370-2#1 5805.1,4304.7 r0 top locked
XP501 "Вилка на плату 280370-2 шаг 2.54мм" CONN-TH_280370-2#1 9752,6308.5 r0 top locked
XP502 "Вилка на плату 280372-1 шаг 2.54мм" CONN-TH_280372-1 7449.9,3497.1 r0 top locked
XP503 "Вилка на плату 280370-2 шаг 2.54мм" CONN-TH_280370-2#2 7257.5,6308.6 r180 top
XP601 "Вилка на плату 826629-3 шаг 2.54мм" HDR-TH_3P-P2.54-V-M-1 6749.8,618.9 r0 top
XP602 "Вилка на плату 826629-3 шаг 2.54мм" HDR-TH_3P-P2.54-V-M-1 7960.6,705.5 r0 top
XP701 "Вилка на плату 280373-2 шаг 2.54мм" CONN-TH_8P-P2.54_280373-1 673.2,5308.6 r90 top
XP702 "Вилка на плату 280372-2 шаг 2.54мм" CONN-TH_DIP-6-2.54 9011.8,6308.6 r180 top locked

## Footprints (in the part's own frame and the unit in brackets; to place one, negate y for a bottom-side part, rotate by r counter-clockwise, add the part's x,y. Pads: shape width x height; smd on the part's side, far side on the other; paste and mask are expansions set on the pad)
"B88069-X8870-B502 (A81-C90X)" [mil]
  round 86.6 hole 47.2 paste-99999 mask+2: 1(-315.9,0) 2(315.9,0)
  silkscreen extent -255,-157 255,158
C0805#1 [mil]
  rect 55.5x53.1 smd paste-3937 mask+2: 1(-39.4,0) 2(39.4,0)
  silkscreen extent -77,-36 77,36
C0805#2 [mil]
  rect 55.5x53.1 smd paste-3937 mask+2: 1(-39.3,0) 2(39.4,0)
  silkscreen extent -77,-36 77,36
C0805#3 [mil]
  rect 55.5x53.1 smd paste-3937 mask+2: 1(-39.4,0) 2(39.3,0)
  silkscreen extent -77,-36 77,36
C1206 [mil]
  rect 58.5x68 smd paste-3937 mask+2: 1(-62.7,0) 2(62.7,0)
  silkscreen extent -101,-43 101,43
CAP-TH_BD5.0-P2.00-D0.8-FD#1 [mil]
  round 51.2 hole 31.5 paste-99999 mask+2: 1(-39.4,-0.1) 2(39.3,-0.1)
  silkscreen extent -98,-98 98,98
CAP-TH_BD5.0-P2.00-D0.8-FD#2 [mil]
  round 51.2 hole 31.5 paste-99999 mask+2: 1(-39.3,0) 2(39.4,0)
  silkscreen extent -98,-98 98,98
CAP-TH_BD5.0-P2.00-D0.8-FD#3 [mil]
  round 51.2 hole 31.5 paste-99999 mask+2: 1(-39.4,0) 2(39.3,0)
  silkscreen extent -98,-98 98,98
CAP-TH_BD13.0-P5.00-D0.6-FD [mil]
  round 70.9 hole 43.3 paste-99999 mask+2: 1(-98.4,0) 2(98.4,0)
  silkscreen extent -256,-256 256,256
CASE-C_6032#1 [mil]
  rect 95.5x98.4 smd paste+0 mask+2: 1(119,0.1) 2(-119,0.1)
  silkscreen extent -184,-76 205,75
CASE-C_6032#2 [mil]
  rect 95.5x98.4 smd paste+0 mask+2: 1(119,0) 2(-119,0)
  silkscreen extent -184,-76 205,75
CONN-TH_8P-P2.54_280373-1 [mil]
  rect 60x60 hole 36 paste-99999 mask+2: 1(-350,0)
  round 60 hole 36 paste-99999 mask+2: 2(-250,0) 3(-150,0) 4(-50,0) 5(50,0) 6(150,0) 7(250,0) 8(350,0)
  silkscreen extent -451,-87 451,110
CONN-TH_20P-P2.00_DS1014-20SF1B [mil]
  round 47.2 hole 31.5 paste-99999 mask+2: 1(-354.3,39.4) 2(-354.3,-39.4) 3(-275.6,39.4) 4(-275.6,-39.4) 5(-196.9,39.4) 6(-196.9,-39.4) 7(-118.1,39.4) 8(-118.1,-39.4) 9(-39.4,39.4) 10(-39.4,-39.4) 11(39.4,39.4) 12(39.4,-39.4) 13(118.1,39.4) 14(118.1,-39.4) 15(196.8,39.4) 16(196.8,-39.4) 17(275.6,39.4) 18(275.6,-39.4) 19(354.3,39.4) 20(354.3,-39.4)
  silkscreen extent -539,-106 539,106
CONN-TH_280370-2#1 [mil]
  round 70.9 hole 47.2 paste-99999 mask+2: 1(50,0) 2(-50,0)
  silkscreen extent -155,-114 155,86
CONN-TH_280370-2#2 [mil]
  rect 70.9x70.9 hole 47.2 paste-99999 mask+2: 1(50,0)
  round 70.9 hole 47.2 paste-99999 mask+2: 2(-50,0)
  silkscreen extent -155,-114 155,86
CONN-TH_280372-1 [mil]
  rect 51.2x51.2 hole 35.4 paste-99999 mask+2: 1(-250,0)
  round 51.2 hole 35.4 paste-99999 mask+2: 2(-150,0) 3(-50,0) 4(50,0) 5(150,0) 6(250,0)
  silkscreen extent -350,-98 350,98
CONN-TH_DIP-6-2.54 [mil]
  rect 70.9x60 hole 43.3 paste-99999 mask+2: 1(-250,0)
  round 70.9 hole 43.3 paste-99999 mask+2: 2(-150,0) 3(-50,0) 4(50,0) 5(150,0) 6(250,0)
  silkscreen extent -350,-91 350,106
"CONTROL POINT"#1 [mil]
  round 126 hole 78.7 paste-99999 mask+2: 1(0,0)
"CONTROL POINT"#2 [mil]
  round 78.7 hole 39.4 paste-99999 mask+2: 1(0,0)
"CONTROL POINT"#3 [mil]
  round 126 hole 78.7 paste-99999 mask+2: 1(0,-2)
DIP-8_L9.7-W6.4-P2.54-LS7.6-BL-1 [mil]
  rect 70.9x70.9 hole 39.4 paste-99999 mask+2: 1(-150,-150)
  round 70.9 hole 39.4 paste-99999 mask+2: 2(-50,-150) 3(50,-150) 4(150,-150) 5(150,150) 6(50,150) 7(-50,150) 8(-150,150)
  silkscreen extent -200,-100 200,100
DO-35_BD2.0-L4.2-P8.20-D0.5-RD#1 [mil]
  round 63 hole 31.5 paste-99999 mask+2: 1(-161.4,0) 2(161.4,0)
  silkscreen extent -87,-43 87,43
DO-35_BD2.0-L4.2-P8.20-D0.5-RD#2 [mil]
  round 63 hole 31.5 paste-99999 mask+2: 1(-161.5,0) 2(161.4,0)
  silkscreen extent -87,-43 87,43
DO-35_BD2.0-L4.2-P8.20-D0.5-RD#3 [mil]
  round 63 hole 31.5 paste-99999 mask+2: 1(-161.4,0) 2(161.5,0)
  silkscreen extent -87,-43 87,43
DO-35_BD2.0-L4.2-P8.20-D0.5-RD#4 [mil]
  round 63 hole 31.5 paste-99999 mask+2: 1(-161.4,0) 2(161.4,-0.1)
  silkscreen extent -87,-43 87,43
DO-35_BD2.0-L4.2-P8.20-D0.5-RD#5 [mil]
  round 63 hole 31.5 paste-99999 mask+2: 1(-161.5,0) 2(161.4,-0.1)
  silkscreen extent -87,-43 87,43
DO-201 [mil]
  round 110.2 hole 59.1 paste-99999 mask+2: 1(0,0) 2(237,0)
  silkscreen extent -110,-110 110,110
FYLS-0805GC [mil]
  rect 35.4x51.2 smd paste+0 mask+4: 1(-41.3,0) 2(41.4,0)
  silkscreen extent -81,-35 69,35
HDR-TH_3P-P2.54-V-M-1 [mil]
  rect 62x70.9 hole 47.2 paste-99999 mask+2: 1(-100,0)
  round 70.9 hole 47.2 paste-99999 mask+2: 2(0,0) 3(100,0)
  silkscreen extent -150,-50 150,50
IDC-TH_10P-P2.54-V-R2-C5-S2.54 [mil]
  round 59.1 hole 43.3 paste-99999 mask+2: 1(-200,-50) 2(-200,50) 3(-100,-50) 4(-100,50) 5(0,-50) 6(0,50) 7(100,-50) 8(100,50) 9(200,-50) 10(200,50)
  silkscreen extent -400,-185 400,160
L2220 [mil]
  rect 86.6x196.8 smd paste+0 mask+2: 1(-86.6,0) 2(86.6,0)
  silkscreen extent -126,-126 126,126
LED0805-R-RD#1 [mil]
  rect 39.4x55.1 smd paste+0 mask+2: 1(41.4,0) 2(-41.3,0)
  silkscreen extent -88,-41 78,40
LED0805-R-RD#2 [mil]
  rect 39.4x55.1 smd paste+0 mask+2: 1(41.3,0) 2(-41.4,0)
  silkscreen extent -88,-41 78,40
MSOP-10_L3.0-W3.0-P0.50-LS4.9-TL [mil]
  oval 40.2x9.1 smd paste+0 mask+2: 1(-94.4,39.4) 2(-94.4,19.7) 3(-94.4,0) 4(-94.4,-19.7) 5(-94.4,-39.4) 6(94.5,-39.4) 7(94.5,-19.7) 8(94.5,0) 9(94.5,19.7) 10(94.5,39.4)
  silkscreen extent -83,-59 59,60
MSOP-10_L3.0-W3.0-P0.50-LS5.0-BL [mil]
  oval 11x63.8 smd paste+0 mask+2: 1(-39.4,-83) 2(-19.7,-83) 3(0,-83) 4(19.7,-83) 5(39.4,-83) 6(39.4,83.1) 7(19.7,83.1) 8(0,83.1) 9(-19.7,83.1) 10(-39.4,83.1)
  silkscreen extent -69,-89 62,42
PA340CC [mil]
  oval 63x78.7 hole 39.4 paste-99999 mask+2: 1(-150,-19.7) 2(-100,-181.1) 3(-50,-19.7) 4(0,-181.1) 5(50,-19.7) 6(100,-181.1) 7(150,-19.7)
  silkscreen extent -205,-205 205,5
PDIP-8_L9.3-W6.4-P2.54-LS7.9-BL-1 [mil]
  oval 60x78.7 hole 35.4 paste-99999 mask+2: 1(-150,-155.6) 2(-50,-155.6) 3(50,-155.6) 4(150,-155.6) 5(150,155.5) 6(50,155.5) 7(-50,155.5) 8(-150,155.5)
  silkscreen extent -213,-156 186,107
PDIP-8_L9.6-W6.4-P2.54-LS7.6-BL-1 [mil]
  round 70.9 hole 39.4 paste-99999 mask+2: 1(-150,-150) 2(-50,-150) 3(50,-150) 4(150,-150) 7(-50,150) 8(-150,150)
  round 75 hole 39.4 paste-99999 mask+2: 5(150,150) 6(50,150)
  silkscreen extent -197,-130 197,130
R0.125W [mil]
  round 39.4 hole 23.6 paste-99999 mask+2: 1(-137.8,0) 2(137.8,0)
  silkscreen extent -109,-34 109,33
R0805#1 [mil]
  rect 44.6x54.2 smd paste-3937 mask+2: 1(-39.3,0) 2(39.4,0)
  silkscreen extent -69,-36 69,36
R0805#2 [mil]
  rect 44.6x54.2 smd paste-3937 mask+2: 1(-39.4,0) 2(39.3,0)
  silkscreen extent -69,-36 69,36
R0805#3 [mil]
  rect 44.6x54.2 smd paste-3937 mask+2: 1(-39.4,0) 2(39.4,0)
  silkscreen extent -69,-36 69,36
R1206#1 [mil]
  rect 47.5x67 smd paste-3937 mask+2: 1(-58.2,0) 2(58.2,0)
  silkscreen extent -91,-43 91,43
R1206#2 [mil]
  rect 47.5x67 smd paste-3937 mask+2: 1(-58.2,0) 2(58.3,0)
  silkscreen extent -91,-43 91,43
R1206#3 [mil]
  rect 47.5x67 smd paste-3937 mask+2: 1(-58.3,0) 2(58.2,0)
  silkscreen extent -91,-43 91,43
RELAY-TH_STANDEXMEDER_DIP05-1A72-13L [mil]
  oval 60x78.7 hole 35.4 paste-99999 mask+2: 2(-200,-150) 6(200,-150) 8(300,150) 14(-300,150)
  silkscreen extent -396,-189 384,142
RELAY-TH_STANDEXMEDER_DIP05-1C90-51L [mil]
  rect 60x60 hole 36 paste-99999 mask+2: 1(-300,-150)
  round 60 hole 36 paste-99999 mask+2: 2(-200,-150) 3(200,-150) 4(200,150) 5(-200,150) 7(300,-150) 8(300,150) 14(-300,150)
  silkscreen extent -380,-128 380,128
RES-ADJ-TH_3329H [mil]
  round 50 hole 24 paste-99999 mask+2: 1(-49.2,-49.2) 2(0,49.2) 3(49.3,-49.2)
  silkscreen extent -134,-99 134,168
RES-TH_L27.4-W2.5-P22.86-D0.8 [mil]
  round 66.9 hole 39.4 paste-99999 mask+2: 1(-450,0) 2(450,0)
  silkscreen extent -540,-85 540,15
RK1/4DCT52R1105F [mil]
  round 78.7 hole 31.5 paste-99999 mask+2: 1(-196.8,0) 2(196.9,0)
  silkscreen extent -155,-45 155,45
SC-70-5_L2.1-W1.3-P0.65-LS2.2-BR [mil]
  rect 35.4x15.7 smd paste+0 mask+2: 1(43.3,-25.6) 2(43.3,0) 3(43.3,25.6) 4(-43.3,25.6) 5(-43.3,-25.6)
  silkscreen extent -28,-55 50,45
SMA/DO-214AC [mil]
  rect 80.6x63.8 smd paste+0 mask+2: 1(-101,0) 2(101,0)
  silkscreen extent -121,-57 106,57
SOD-123_L2.7-W1.6-LS3.7-RD#1 [mil]
  rect 35.8x48 smd paste+0 mask+2: 1(-64.4,0) 2(64.4,0)
  silkscreen extent -63,-40 54,39
SOD-123_L2.7-W1.6-LS3.7-RD#2 [mil]
  rect 35.8x48 smd paste+0 mask+2: 1(-64.4,0) 2(64.3,0)
  silkscreen extent -63,-40 54,39
SOD-123_L2.7-W1.6-LS3.7-RD#3 [mil]
  rect 35.8x48 smd paste+0 mask+2: 1(-64.4,-0.1) 2(64.4,-0.1)
  silkscreen extent -63,-40 54,39
SOD-123_L2.7-W1.6-LS3.7-RD#4 [mil]
  rect 35.8x48 smd paste+0 mask+2: 1(-64.3,0) 2(64.4,0)
  silkscreen extent -63,-40 54,40
SOD-123_L2.7-W1.6-LS3.7-RD-1#1 [mil]
  rect 47.2x37.4 smd paste+0 mask+2: 1(-66.9,0) 2(67,0)
  silkscreen extent -71,-39 53,38
SOD-123_L2.7-W1.6-LS3.7-RD-1#2 [mil]
  rect 47.2x37.4 smd paste+0 mask+2: 1(-67,0) 2(66.9,0)
  silkscreen extent -71,-39 53,38
SOD-123_L2.7-W1.6-LS3.7-RD-1#3 [mil]
  rect 47.2x37.4 smd paste+0 mask+2: 1(-66.9,0) 2(66.9,0)
  silkscreen extent -71,-38 53,38
SOD-123_L2.8-W1.8-LS3.7-RD#1 [mil]
  rect 37.4x45.3 smd paste+0 mask+2: 1(-66.6,0) 2(66.6,0)
  silkscreen extent -62,-34 55,34
SOD-123_L2.8-W1.8-LS3.7-RD#2 [mil]
  rect 37.4x45.3 smd paste+0 mask+2: 1(-66.7,0) 2(66.6,0)
  silkscreen extent -62,-34 55,34
SOD-123_L2.8-W1.8-LS3.7-RD#3 [mil]
  rect 37.4x45.3 smd paste+0 mask+2: 1(-66.6,0) 2(66.7,0)
  silkscreen extent -62,-34 55,34
SOIC-8_L4.9-W3.9-P1.27-LS6.0-BL#1 [mil]
  oval 23.1x80.5 smd paste+0 mask+2: 1(-75,-109.2) 2(-25,-109.2) 3(25,-109.2) 4(75,-109.2) 5(75,109.1) 6(25,109.1) 7(-25,109.1) 8(-75,109.1)
  silkscreen extent -110,-115 100,60
SOIC-8_L4.9-W3.9-P1.27-LS6.0-BL#2 [mil]
  oval 23.1x80.5 smd paste+0 mask+2: 1(-75,-109.1) 2(-25,-109.1) 3(25,-109.1) 4(75,-109.1) 5(75,109.2) 6(25,109.2) 7(-25,109.2) 8(-75,109.2)
  silkscreen extent -110,-115 100,60
SOIC-8_L5.0-W4.0-P1.27-LS6.1-BL [mil]
  oval 22.4x76.8 smd paste+0 mask+2: 1(-75,-106.5) 2(-25,-106.5) 3(25,-106.5) 4(75,-106.5) 5(75,106.5) 6(25,106.5) 7(-25,106.5) 8(-75,106.5)
  silkscreen extent -98,-58 98,58
SOIC-14_L8.7-W3.9-P1.27-LS6.0-BL [mil]
  oval 22.6x80.2 smd paste+0 mask+2: 1(-150,-109.1) 2(-100,-109.1) 3(-50,-109.1) 4(0,-109.1) 5(50,-109.1) 6(100,-109.1) 7(150,-109.1) 8(150,109) 9(100,109) 10(50,109) 11(0,109) 12(-50,109) 13(-100,109) 14(-150,109)
  silkscreen extent -185,-115 173,60
SOIC-16_L9.9-W3.9-P1.27-LS6.0-BL [mil]
  oval 23.7x77.6 smd paste+0 mask+2: 1(-175,-107.7) 2(-125,-107.7) 3(-75,-107.7) 4(-25,-107.7) 5(25,-107.7) 6(75,-107.7) 7(125,-107.7) 8(175,-107.7) 9(175,107.7) 10(125,107.7) 11(75,107.7) 12(25,107.7) 13(-25,107.7) 14(-75,107.7) 15(-125,107.7) 16(-175,107.7)
  silkscreen extent -211,-111 198,60
SOIC-16_L10.3-W7.5-P1.27-LS10.3-BL#1 [mil]
  oval 22.6x94.5 smd paste+0 mask+2: 1(-174.9,-187) 2(-124.9,-187) 3(-74.9,-187) 4(-24.9,-187) 5(25.1,-187) 6(75.1,-187) 7(125.1,-187) 8(175.1,-187) 9(175.1,187.1) 10(125.1,187.1) 11(75.1,187.1) 12(25.1,187.1) 13(-24.9,187.1) 14(-74.9,187.1) 15(-124.9,187.1) 16(-174.9,187.1)
  silkscreen extent -210,-193 206,131
SOIC-16_L10.3-W7.5-P1.27-LS10.3-BL#2 [mil]
  oval 22.6x94.5 smd paste+0 mask+2: 1(-174.9,-187) 2(-124.9,-187) 3(-74.9,-187) 4(-24.9,-187) 5(25.1,-187) 6(75.1,-187) 7(125.1,-187) 8(175.1,-187) 9(175.1,187) 10(125.1,187) 11(75.1,187) 12(25.1,187) 13(-24.9,187) 14(-74.9,187) 15(-124.9,187) 16(-174.9,187)
  silkscreen extent -210,-193 206,131
SOIC-16_L10.3-W7.5-P1.27-LS10.3-BL#3 [mil]
  oval 22.6x94.5 smd paste+0 mask+2: 1(-175,-187) 2(-125,-187) 3(-75,-187) 4(-25,-187) 5(25,-187) 6(75,-187) 7(125,-187) 8(175,-187) 9(175,187.1) 10(125,187.1) 11(75,187.1) 12(25,187.1) 13(-25,187.1) 14(-75,187.1) 15(-125,187.1) 16(-175,187.1)
  silkscreen extent -210,-193 206,131
SOIC-16_L10.3-W7.5-P1.27-LS10.3-BL#4 [mil]
  oval 22.6x94.5 smd paste+0 mask+2: 1(-175,-187.1) 2(-125,-187.1) 3(-75,-187.1) 4(-25,-187.1) 5(25,-187.1) 6(75,-187.1) 7(125,-187.1) 8(175,-187.1) 9(175,187) 10(125,187) 11(75,187) 12(25,187) 13(-25,187) 14(-75,187) 15(-125,187) 16(-175,187)
  silkscreen extent -210,-193 206,131
SOIC-16_L10.3-W7.5-P1.27-LS10.3-BL#5 [mil]
  oval 22.6x94.5 smd paste+0 mask+2: 1(-175,-187) 2(-125,-187) 3(-75,-187) 4(-25,-187) 5(25,-187) 6(75,-187) 7(125,-187) 8(175,-187) 9(175,187) 10(125,187) 11(75,187) 12(25,187) 13(-25,187) 14(-75,187) 15(-125,187) 16(-175,187)
  silkscreen extent -210,-193 206,131
SOT-23-3_L2.9-W1.3-P1.90-LS2.4-BR#1 [mil]
  rect 49.2x27.6 smd paste+0 mask+2: 1(39.3,-37.4) 2(39.3,37.4) 3(-39.4,0)
  silkscreen extent -29,-60 29,60
SOT-23-3_L2.9-W1.3-P1.90-LS2.4-BR#2 [mil]
  rect 49.2x27.6 smd paste+0 mask+2: 1(39.4,-37.4) 2(39.4,37.4) 3(-39.3,0)
  silkscreen extent -29,-60 29,60
SOT-23-3_L2.9-W1.3-P1.90-LS2.4-BR#3 [mil]
  rect 49.2x27.6 smd paste+0 mask+2: 1(39.4,-37.4) 2(39.4,37.4) 3(-39.4,0)
  silkscreen extent -29,-60 29,60
SOT-23-3_L3.0-W1.6-P1.90-LS2.8-L#1 [mil]
  rect 42.1x20.9 smd paste+0 mask+2: 1(-44.6,0) 2(44.7,-37.4) 3(44.7,37.4)
  silkscreen extent -79,-60 35,60
SOT-23-3_L3.0-W1.6-P1.90-LS2.8-L#2 [mil]
  rect 42.1x20.9 smd paste+0 mask+2: 1(-44.7,0) 2(44.6,-37.4) 3(44.6,37.4)
  silkscreen extent -79,-61 35,61
SOT-23-3_L3.0-W1.6-P1.90-LS2.8-L#3 [mil]
  rect 42.1x20.9 smd paste+0 mask+2: 1(-44.7,0) 2(44.7,-37.4) 3(44.7,37.4)
  silkscreen extent -79,-60 35,60
SOT-23-6_L2.9-W1.6-P0.95-LS2.7-BL [mil]
  rect 23.6x43.3 smd paste+0 mask+2: 1(-37.4,-55.1) 2(0,-55.1) 3(37.4,-55.1) 4(37.4,55.1) 5(0,55.1) 6(-37.4,55.1)
  silkscreen extent -72,-57 61,35
SOT-23-6_L2.9-W1.6-P0.95-LS2.8-BL#1 [mil]
  rect 20.9x42.2 smd paste+0 mask+2: 1(-37.4,-45.2) 2(0,-45.2) 3(37.4,-45.2) 4(37.4,45.3) 5(0,45.3) 6(-37.4,45.3)
  silkscreen extent -72,-57 61,35
SOT-23-6_L2.9-W1.6-P0.95-LS2.8-BL#2 [mil]
  rect 20.9x42.2 smd paste+0 mask+2: 1(-37.4,-45.3) 2(0,-45.3) 3(37.4,-45.3) 4(37.4,45.2) 5(0,45.2) 6(-37.4,45.2)
  silkscreen extent -72,-57 61,35
SOT-89-3_L4.5-W2.5-P1.50-LS4.2-BR [mil]
  rect 62x26.5 smd paste+0 mask+2: 1(53.4,-59) 3(53.4,59.1)
  round 37.4 smd: 2(-38.1,0)
  Top Layer region: -89.9,37.4 -16.9,37.4 -15.2,37.4 -13.4,37.3 -11.7,37 -10,36.8 -8.2,36.4 -6.5,35.9 -4.9,35.4 -3.2,34.8 -1.6,34.1 0,33.4 1.5,32.6 3,31.7 4.5,30.7 5.9,29.6 7.3,28.5 8.6,27.4 9.8,26.2 11,24.9 12.2,23.5 13.2,22.1 14.2,20.7 15.2,19.2 16,17.7 16.8,16.1 17.5,13 84.4,13 84.4,-13 17.5,-13 16.8,-16.1 16,-17.7 15.2,-19.2 14.2,-20.7 13.2,-22.1 12.2,-23.5 11,-24.8 9.8,-26.1 8.6,-27.3 7.3,-28.5 5.9,-29.6 4.5,-30.6 3,-31.6 1.5,-32.5 0,-33.3 -1.6,-34.1 -3.2,-34.8 -4.9,-35.4 -6.5,-35.9 -8.2,-36.4 -10,-36.7 -11.7,-37 -13.4,-37.2 -15.2,-37.3 -16.9,-37.4 -89.9,-37.4 -91.7,-37.3 -93.4,-37.2 -95.2,-37 -96.9,-36.7 -98.6,-36.4 -100.3,-35.9 -102,-35.4 -103.6,-34.8 -105.2,-34.1 -106.8,-33.3 -108.4,-32.5 -109.9,-31.6 -111.3,-30.6 -112.8,-29.6 -114.1,-28.5 -115.4,-27.3 -116.7,-26.1 -117.9,-24.8 -119,-23.5 -120.1,-22.1 -121.1,-20.7 -122,-19.2 -122.9,-17.7 -123.7,-16.1 -124.4,-14.5 -125,-12.9 -125.6,-11.2 -126.1,-9.5 -126.5,-7.8 -126.8,-6.1 -127.1,-4.4 -127.2,-2.6 -127.3,-0.9 -127.3,0.9 -127.2,2.6 -127.1,4.4 -126.8,6.1 -126.5,7.8 -126.1,9.6 -125.6,11.2 -125,12.9 -124.4,14.5 -123.7,16.1 -122.9,17.7 -122,19.2 -121.1,20.7 -120.1,22.1 -119,23.5 -117.9,24.9 -116.7,26.2 -115.4,27.4 -114.1,28.5 -112.8,29.6 -111.3,30.7 -109.9,31.7 -108.4,32.6 -106.8,33.4 -105.2,34.1 -103.6,34.8 -102,35.4 -100.3,35.9 -98.6,36.4 -96.9,36.8 -95.2,37 -93.4,37.3 -91.7,37.4
  silkscreen extent -77,-92 28,92
SOT-223-3_L6.5-W3.4-P2.30-LS7.0-BR#1 [mil]
  rect 98.4x43.3 smd paste+0 mask+2: 1(117,-90.6) 2(117,0) 3(117,90.5)
  rect 92.1x141.7 smd paste+0 mask+2: 4(-116.9,0)
  silkscreen extent -62,-131 54,131
SOT-223-3_L6.5-W3.4-P2.30-LS7.0-BR#2 [mil]
  rect 98.4x43.3 smd paste+0 mask+2: 1(116.9,-90.5) 2(116.9,0) 3(116.9,90.6)
  rect 92.1x141.7 smd paste+0 mask+2: 4(-116.9,0)
  silkscreen extent -62,-131 54,131
SOT-223-3_L6.5-W3.4-P2.30-LS7.0-BR#3 [mil]
  rect 98.4x43.3 smd paste+0 mask+2: 1(116.9,-90.6) 2(116.9,0) 3(116.9,90.5)
  rect 92.1x141.7 smd paste+0 mask+2: 4(-116.9,0)
  silkscreen extent -62,-131 54,131
SOT-223-3_L6.5-W3.4-P2.30-LS7.0-BR#4 [mil]
  rect 98.4x43.3 smd paste+0 mask+2: 1(116.9,-90.5) 2(116.9,0) 3(116.9,90.6)
  rect 92.1x141.7 smd paste+0 mask+2: 4(-117,0)
  silkscreen extent -62,-131 54,131
SOT-223-3_L6.5-W3.4-P2.30-LS7.0-BR#5 [mil]
  rect 98.4x43.3 smd paste+0 mask+2: 1(116.9,-90.6) 2(116.9,0) 3(116.9,90.5)
  rect 92.1x141.7 smd paste+0 mask+2: 4(-117,0)
  silkscreen extent -62,-131 54,131
SOT-223-4_L6.5-W3.5-P2.30-LS7.0-BR#1 [mil]
  rect 97.2x38.6 smd paste+0 mask+2: 1(111.6,-90.6) 2(111.6,0) 3(111.6,90.5)
  rect 97.2x141.7 smd paste+0 mask+2: 4(-111.6,0)
  silkscreen extent -54,-131 54,131
SOT-223-4_L6.5-W3.5-P2.30-LS7.0-BR#2 [mil]
  rect 97.2x38.6 smd paste+0 mask+2: 1(111.6,-90.5) 2(111.6,0) 3(111.6,90.6)
  rect 97.2x141.7 smd paste+0 mask+2: 4(-111.6,0)
  silkscreen extent -54,-131 54,131
SOT-223-4_L6.5-W3.5-P2.30-LS7.0-BR#3 [mil]
  rect 97.2x38.6 smd paste+0 mask+2: 1(111.7,-90.5) 2(111.7,0) 3(111.7,90.6)
  rect 97.2x141.7 smd paste+0 mask+2: 4(-111.6,0)
  silkscreen extent -54,-131 54,131
SOT-223-4_L6.5-W3.5-P2.30-LS7.0-BR#4 [mil]
  rect 97.2x38.6 smd paste+0 mask+2: 1(111.6,-90.6) 2(111.6,0) 3(111.6,90.6)
  rect 97.2x141.7 smd paste+0 mask+2: 4(-111.6,0)
  silkscreen extent -54,-131 54,131
SOT-223-4_L6.5-W3.5-P2.30-LS7.0-BR#5 [mil]
  rect 97.2x38.6 smd paste+0 mask+2: 1(111.7,-90.6) 2(111.7,0) 3(111.7,90.5)
  rect 97.2x141.7 smd paste+0 mask+2: 4(-111.6,0)
  silkscreen extent -54,-131 54,131
SOT-223-4_L6.5-W3.5-P2.30-LS7.0-BR#6 [mil]
  rect 97.2x38.6 smd paste+0 mask+2: 1(111.6,-90.6) 2(111.6,0) 3(111.6,90.6)
  rect 97.2x141.7 smd paste+0 mask+2: 4(-111.7,0)
  silkscreen extent -54,-131 54,131
SOT-223-4_L6.5-W3.5-P2.30-LS7.0-BR#7 [mil]
  rect 97.2x38.6 smd paste+0 mask+2: 1(111.6,-90.5) 2(111.6,0) 3(111.6,90.6)
  rect 97.2x141.7 smd paste+0 mask+2: 4(-111.7,0)
  silkscreen extent -54,-131 54,131
SOT-223_L6.5-W3.5-P2.30-LS7.0-BR#1 [mil]
  rect 97x41.3 smd paste+0 mask+2: 1(112.5,-90.6) 2(112.5,0) 3(112.5,90.5)
  rect 97x139.4 smd paste+0 mask+2: 4(-112.5,0)
  silkscreen extent -55,-134 55,134
SOT-223_L6.5-W3.5-P2.30-LS7.0-BR#2 [mil]
  rect 97x41.3 smd paste+0 mask+2: 1(112.5,-90.5) 2(112.5,0) 3(112.5,90.6)
  rect 97x139.4 smd paste+0 mask+2: 4(-112.5,0)
  silkscreen extent -55,-134 55,134
TO-220-2_L10.4-W3.2-P5.08-L#1 [mil]
  round 66.9 hole 47.2 paste-99999 mask+2: 1(-100,0) 2(100,0)
  silkscreen extent -205,-118 205,45
TO-220-2_L10.4-W3.2-P5.08-L#2 [mil]
  round 78.7 hole 47.2 paste-99999 mask+2: 1(-100,0) 2(100,0)
  silkscreen extent -205,-118 205,45
TO-220-3#1 [mil]
  rect 98.4x78.7 hole 51.2 paste-99999 mask+2: 1(-44.9,100)
  oval 98.4x78.7 hole 51.2 paste-99999 mask+2: 2(90.1,-0.1) 3(-44.9,-100.1)
  silkscreen extent -113,-200 105,200
TO-220-3#2 [mil]
  rect 98.4x78.7 hole 51.2 paste-99999 mask+2: 1(-44.9,100)
  oval 98.4x78.7 hole 51.2 paste-99999 mask+2: 2(90.1,0) 3(-44.9,-100)
  silkscreen extent -113,-200 105,200
TO-220-3_L10.0-W4.5-P2.54-L [mil]
  rect 70.9x102.4 hole 47.2 paste-99999 mask+2: 1(-100,0.2)
  oval 70.9x102.4 hole 47.2 paste-99999 mask+2: 2(0,0.2) 3(100,-0.2)
  silkscreen extent -209,-108 209,122
TO-220AC-2_L10.0-W4.5-P5.08-T#1 [mil]
  rect 98.4x78.7 hole 55.1 paste-99999 mask+2: 1(0,100)
  oval 98.4x78.7 hole 55.1 paste-99999 mask+2: 3(0,-100)
  silkscreen extent -106,-209 114,209
TO-220AC-2_L10.0-W4.5-P5.08-T#2 [mil]
  rect 98.4x78.7 hole 55.1 paste-99999 mask+2: 1(0,100)
  oval 98.4x78.7 hole 55.1 paste-99999 mask+2: 3(0.1,-100)
  silkscreen extent -106,-209 114,209